# Altium PCB USB Dongle PCB.PcbDoc
Units mm, origin at the board's own origin, x right, y up, seen from the top; angles counter-clockwise.
Board outline 35 x 16 mm, 4 copper layers (Component Side, Ground Plane, Power Plane, Solder Side), stack 1.1 mm thick; 41 components, 33 nets, 166 pads, 35 vias.
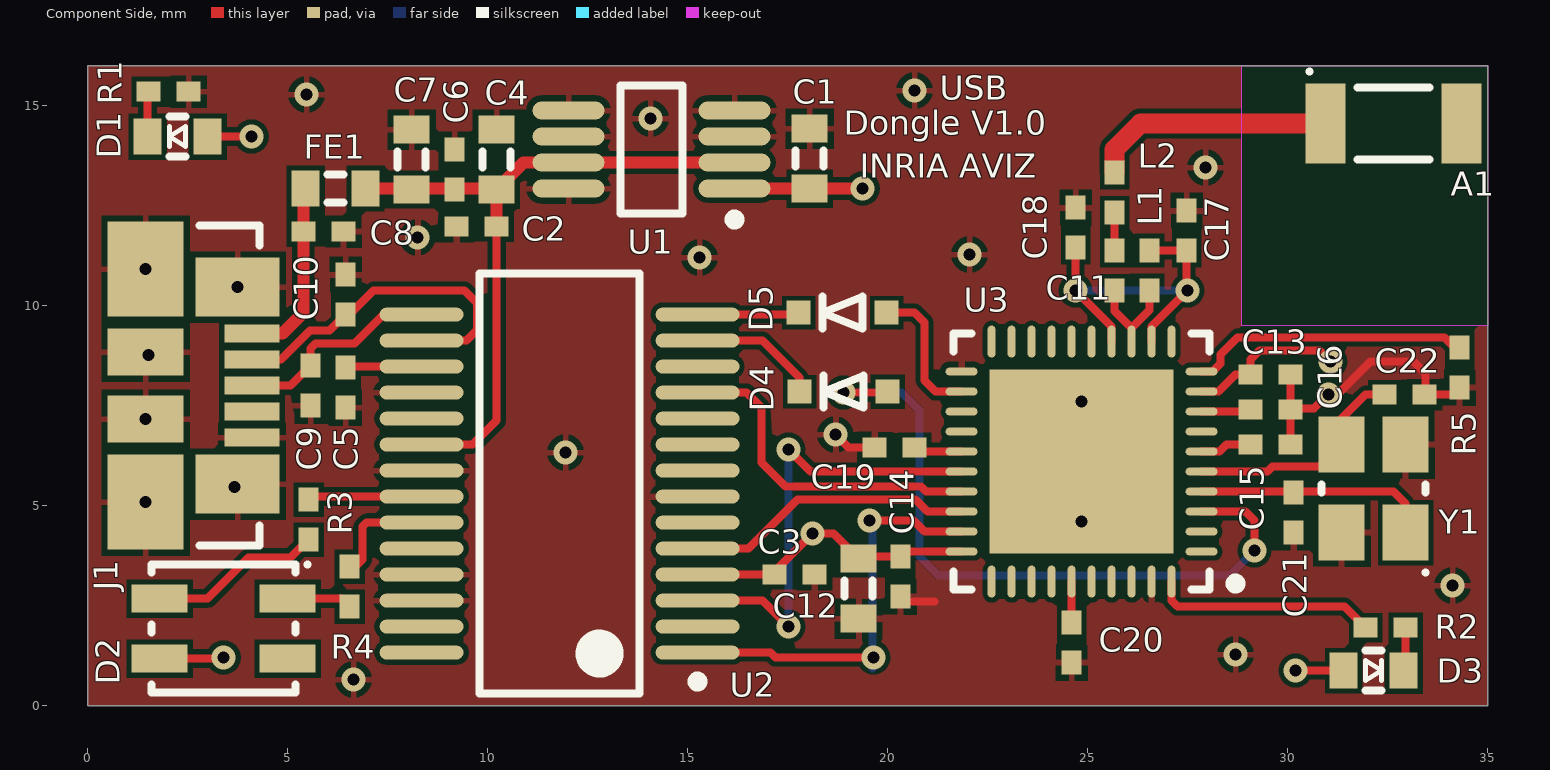
[diagram p0: Component Side view]
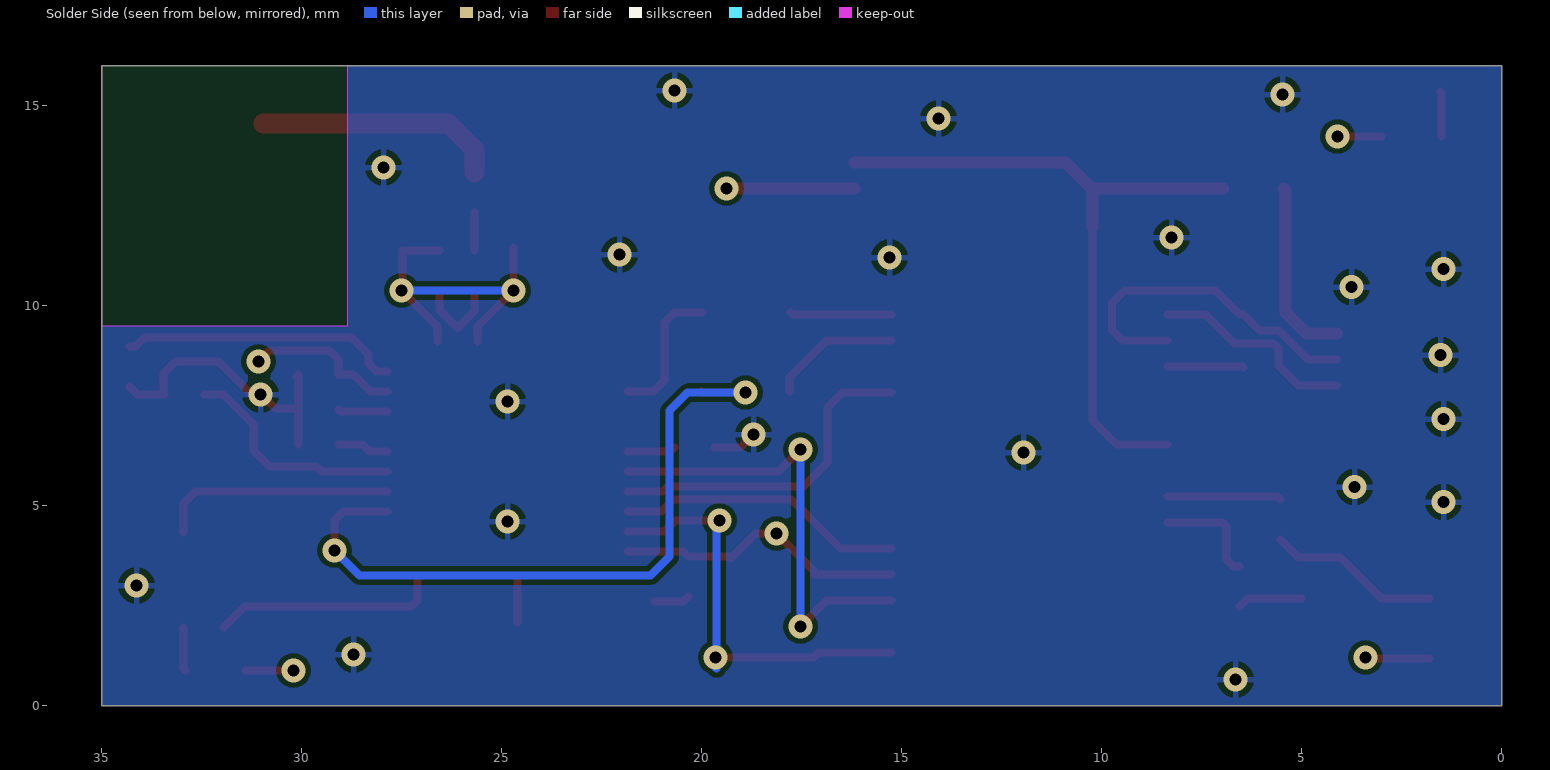
[diagram p1: Solder Side view, seen from below]
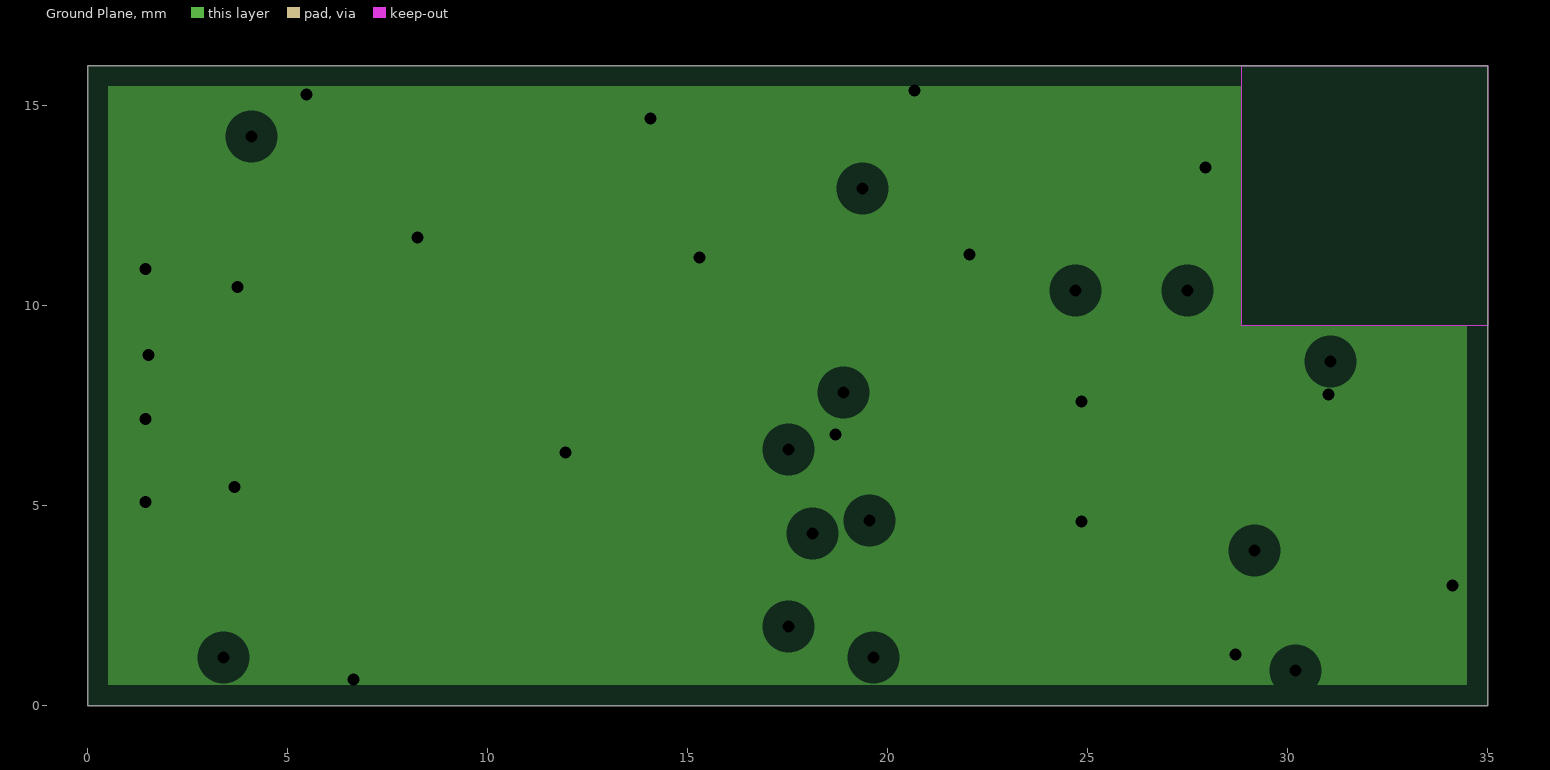
[diagram p2: Ground Plane, clearances drawn from the general rule]
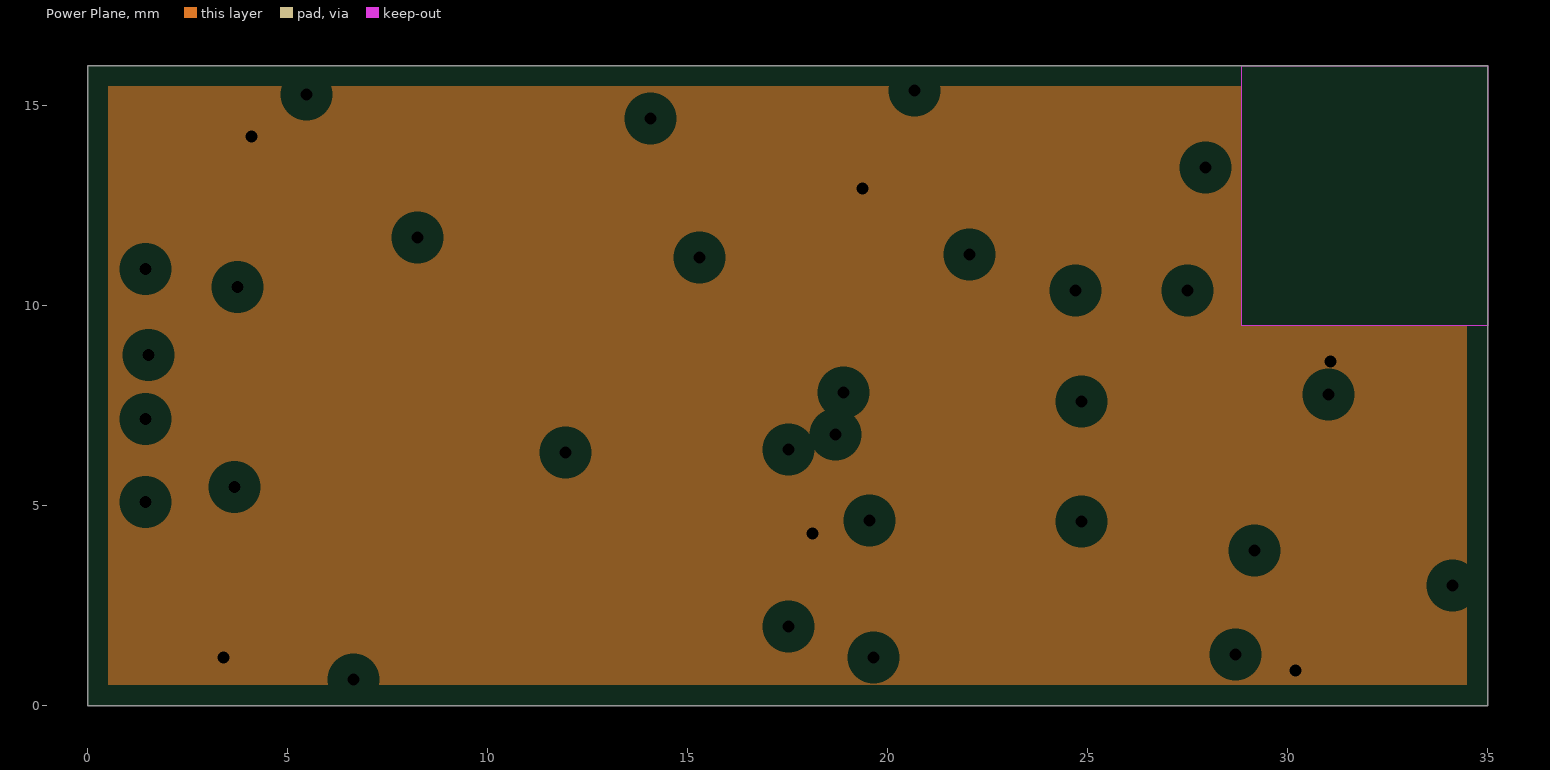
[diagram p3: Power Plane, clearances drawn from the general rule]

## Layer stack, top to bottom
Component Side: signal copper 0.035
Dielectric 1: core 0.3, FR-4, Dk 4.8
Ground Plane: plane copper 0.035, net GND
Dielectric 3: prepreg 0.36, Dk 4.2
Power Plane: plane copper 0.035, net +3.3V
Dielectric 4: core 0.3, Dk 4.2
Solder Side: signal copper 0.035

## Board outline
0,0 0,16 35,16 35,0 0,0

## Design rules (kind name [scope] priority, off if disabled: settings)
Clearance [All] p1: gap=0.125
DiffPairsRouting [All] p1: maxlimit=10 minlimit=0.125 mostfreqgap=0.15 toplayer_minwidth=0.381 toplayer_maxwidth=0.381 toplayer_prefwidth=0.381 bottomlayer_minwidth=0.381 bottomlayer_maxwidth=0.381 bottomlayer_prefwidth=0.381 maxuncoupledlength=12.7
FabricationTestPointUsage FabricationTestPointUsage_1 [All] p1: valid=0 allowmultiple=FALSE
FabricationTestpoint FabricationTestpoint_1 [All] p1: side=3 testpointundercomponent=TRUE minsize=1.016 maxsize=2.54 preferedsize=1.524 minholesize=0 maxholesize=1.016 preferedholesize=0.813 testpointgrid=0.025 allowsidetop=TRUE allowsidebottom=TRUE usegrid=TRUE gridtolerance=0
HoleSize [All] p1: absolutevalues=TRUE maxlimit=6 minlimit=0.2 maxpercent=80.000 minpercent=20.000
HoleSize FabricationTestpoint [All] p2 off: absolutevalues=TRUE maxlimit=2.54 minlimit=0.025 maxpercent=80.000 minpercent=20.000
HoleSize FabricationTestPointUsage [All] p3 off: absolutevalues=TRUE maxlimit=2.54 minlimit=0.025 maxpercent=80.000 minpercent=20.000
MaxMinImpedance "Antenna Impedance" [InNetClass(Antenna)] p1: minimum=50,00 maximum=50,00
MinimumSolderMaskSliver [All] p1: minsoldermaskwidth=0.05
NetAntennae [All] p1 off: netantennaetolerance=0
PlaneClearance [All] p1: clearance=0.5
PlaneConnect [All] p1: planeconnectstyle=Relief reliefexpansion=0.4 reliefentries=4 reliefconductorwidth=0.15 reliefairgap=0.15
PolygonConnect [All] p1: connectstyle=Relief reliefconductorwidth=0.15 reliefentries=4 polygonreliefangle="90 Angle" airgapwidth=0.15
RoutingCorners [All] p1: cornerstyle=45-Degree minsetback=1.25 maxsetback=1.25
RoutingVias [All] p1: holewidth=0.3 width=0.6 viastyle="Through Hole" minholewidth=0.3 minwidth=0.6 maxholewidth=0.3 maxwidth=0.6
SilkToBoardRegionClearance [All] p1 off:
SilkToSilkClearance [All] p1: silktosilkclearance=0.1
SilkToSolderMaskClearance [IsPad] p1: minsilkscreentomaskgap=0.1 clearancetoexposedcopper=TRUE
SolderMaskExpansion [All] p1: expansion=0.075
Width [All] p1: maxlimit=0.5 minlimit=0.125 preferedwidth=0.2 minimp=50.000000 maximp=50.000000 favimp=50.000000
17 further rules are at their usual default settings.

## Components (designator, comment, footprint, x,y, rotation, side; value= is the part's Value field where it differs from the comment)
A1 "2450AT18A100" 2450AT18A100 32.65,14.55 r0 top
C1 "10uF 0603 X5R 6.3V AVX" 0603 18.05,13.675 r270 top
C2 "100nF 0402 X7R 16V ±10%" 0402 9.725,11.975 r0 top
C3 "100nF 0402 X7R 16V ±10%" 0402 17.675,3.275 r180 top
C4 "1uF 0603 X5R 10V MULTICOMP" 0603 10.225,13.65 r270 top
C5 "100nF 0402 X7R 16V ±10%" 0402 6.45,7.95 r270 top
C6 "100nF 0402 X7R 16V ±10%" 0402 9.175,13.4 r270 top
C7 "4.7uF 0603 X5R 10V KEMET" 0603 8.1,13.65 r270 top
C8 "10nF 0402 X7R 25V KEMET" 0402 5.9,11.85 r0 top
C9 "47pF 0402 NP0 50V MURATA" 0402 5.575,8 r90 top
C10 "47pF 0402 NP0 50V MURATA" 0402 6.45,10.275 r270 top
C11 "47pF 0402 NP0 50V ±5%" 0402 25.675,10.875 r270 top
C12 "10uF 0603 X5R 6.3V ±20%" 0603 19.275,2.925 r90 top
C13 "100nF 0402 X7R 16V ±10%" 0402 29.575,8.275 r180 top
C14 "100nF 0402 X7R 16V ±10%" 0402 20.325,3.225 r90 top
C15 "100nF 0402 X7R 16V ±10%" 0402 29.575,6.525 r180 top
C16 "10nF" 0402 29.575,7.4 r180 top
C17 "47pF 0402 NP0 50V ±5%" 0402 27.475,11.875 r270 top
C18 "100nF 0402 X7R 16V ±10%" 0402 24.7,11.95 r270 top
C19 "100nF 0402 X7R 16V ±10%" 0402 20.175,6.45 r0 top
C20 "100nF 0402 X7R 16V ±10%" 0402 24.6,1.575 r90 top
C21 "15pF 0402 NP0 50V ±5%" 0402 30.15,4.825 r90 top
C22 "15pF 0402 NP0 50V ±5%" 0402 32.925,7.775 r180 top
D1 "OVS-0604" "0603 - LED" 2.25,14.225 r180 top
D2 "RGB LED PLCC" PLCC_4 3.4,1.925 r0 top
D3 "OVS-0603" "0603 - LED" 32.15,0.875 r0 top
D4 "Schottky barrier single diode" SOD-323 18.9,7.85 r0 top
D5 "Schottky barrier single diode" SOD-323 18.875,9.825 r0 top
FE1 "MURATA - BLM18PG471SN1D" 0603 6.2,12.925 r0 top
J1 "MICRO USB B" MICRO_USB_B 4.8,8 r0 top
L1 "3.9NH  0402 MURATA" 0402 26.55,10.875 r90 top
L2 "5.1NH  0402 MURATA" 0402 25.675,12.825 r270 top
R1 "180R 0402 1% VISHAY" 0402 2.025,15.35 r180 top
R2 "180R 0402 1/16W ±1%" 0402 32.45,1.95 r0 top
R3 "180R 0402 1/16W ±1%" 0402 5.525,4.65 r270 top
R4 "180R 0402 1/16W ±1%" 0402 6.55,2.975 r270 top
R5 "43K 0402 1/16W ±1%" 0402 34.3,8.45 r270 top
U1 "ADP3333ARMZ-3.3-R7" ADI-RM-8_N 14.1,13.9 r180 top
U2 "FT232RL" SSOP-28_N 11.8,5.55 r180 top
U3 "JN516X" QFN50P600X600X100_HS-41N 24.85,6.1 r180 top
Y1 "TSX-3225" TSX-3225 32.15,5.425 r270 top

## Footprints (in the part's own frame and the unit in brackets; to place one, negate y for a bottom-side part, rotate by r counter-clockwise, add the part's x,y. Pads: shape width x height; smd on the part's side, far side on the other; paste and mask are expansions set on the pad)
0402 [mm] "Chip Body 1.0 x 0.5 mm (LxW typ)"
  rect 0.6x0.5 smd: 1(-0.5,0) 2(0.5,0)
  body extent -0.55,-0.3 0.55,0.3, height 0.55
0603 [mm] "Chip Body 1.6 x 0.8 mm (LxW typ)"
  rect 0.7x0.9 smd: 1(-0.75,0) 2(0.75,0)
  silkscreen extent -0.2,-0.35 0.2,0.35, body extent -0.85,-0.48 0.85,0.48, height 0.9
"0603 - LED" [mm] "Chip Body 1.6 x 0.8 mm (LxW typ)"
  rect 0.7x0.9 smd: 1(-0.75,0) 2(0.75,0)
  silkscreen extent -0.2,-0.5 0.2,0.5, body extent -0.85,-0.48 0.85,0.48, height 0.9
2450AT18A100 [mm]
  rect 1x2 smd: 1(-1.7,0) 2(1.7,0)
  silkscreen extent -2.1,-0.9 0.9,1.3, body extent -1.7,-0.9 1.7,0.9, height 1.9
ADI-RM-8_N [mm] "SOP, 8-Leads, Body 3x3mm, Pitch 0.65mm, IPC Medium Density"
  oval 1.8x0.45 smd: 1(-2.075,0.975) 2(-2.075,0.325) 3(-2.075,-0.325) 4(-2.075,-0.975) 5(2.075,-0.975) 6(2.075,-0.325) 7(2.075,0.325) 8(2.075,0.975)
  silkscreen extent -2.2,-1.6 0.77,1.87, body extent -1.6,-1.6 1.6,1.6, height 1.1
MICRO_USB_B [mm]
  rect 1.38x0.45 smd: 1(-0.69,1.3) 2(-0.69,0.65) 3(-0.69,0) 4(-0.69,-0.65) 5(-0.69,-1.3)
  rect 2.1x1.475 smd: 6(-1.05,-2.462) 7(-1.05,2.462)
  rect 1.9x1.175 smd: 8(-3.35,-0.837) 9(-3.35,0.837)
  rect 1.9x2.375 smd: 10(-3.35,-2.913) 11(-3.35,2.913)
  silkscreen extent -2,-4 -0.5,4, body extent -5.88,-3.99 -0.45,3.99, height 2.69
PLCC_4 [mm] "Chip Body 1.6 x 0.8 mm (LxW typ)"
  rect 1.4x0.7 smd: 1(1.6,0.75) 2(-1.6,0.75) 3(-1.6,-0.75) 4(1.6,-0.75)
  silkscreen extent -1.8,-1.6 2.1,1.6, body extent -1.8,-1.6 1.8,1.6, height 1.9
QFN50P600X600X100_HS-41N [mm]
  oval 0.8x0.2 smd: 1(-3,2.25) 2(-3,1.75) 3(-3,1.25) 4(-3,0.75) 5(-3,0.25) 6(-3,-0.25) 7(-3,-0.75) 8(-3,-1.25) 9(-3,-1.75) 10(-3,-2.25) 21(3,-2.25) 22(3,-1.75) 23(3,-1.25) 24(3,-0.75) 25(3,-0.25) 26(3,0.25) 27(3,0.75) 28(3,1.25) 29(3,1.75) 30(3,2.25)
  oval 0.2x0.8 smd: 11(-2.25,-3) 12(-1.75,-3) 13(-1.25,-3) 14(-0.75,-3) 15(-0.25,-3) 16(0.25,-3) 17(0.75,-3) 18(1.25,-3) 19(1.75,-3) 20(2.25,-3) 31(2.25,3) 32(1.75,3) 33(1.25,3) 34(0.75,3) 35(0.25,3) 36(-0.25,3) 37(-0.75,3) 38(-1.25,3) 39(-1.75,3) 40(-2.25,3)
  rect 4.6x4.6 smd: 41(0,0)
  silkscreen extent -3.98,-3.2 3.2,3.2, body extent -3.05,-3.05 3.05,3.05, height 1
SOD-323 [mm]
  rect 0.6x0.6 smd: 1(-1.1,0) 2(1.1,0)
  silkscreen extent -0.5,-0.4 0.5,0.4, body extent -1.05,-0.82 1.05,0.82, height 0.9
SSOP-28_N [mm] "SOP, 28-Leads, Body 10.2x5.3mm, Pitch 0.65mm, IPC Medium Density"
  oval 2.1x0.35 smd: 1(-3.45,4.225) 2(-3.45,3.575) 3(-3.45,2.925) 4(-3.45,2.275) 5(-3.45,1.625) 6(-3.45,0.975) 7(-3.45,0.325) 8(-3.45,-0.325) 9(-3.45,-0.975) 10(-3.45,-1.625) 11(-3.45,-2.275) 12(-3.45,-2.925) 13(-3.45,-3.575) 14(-3.45,-4.225) 15(3.45,-4.225) 16(3.45,-3.575) 17(3.45,-2.925) 18(3.45,-2.275) 19(3.45,-1.625) 20(3.45,-0.975) 21(3.45,-0.325) 22(3.45,0.325) 23(3.45,0.975) 24(3.45,1.625) 25(3.45,2.275) 26(3.45,2.925) 27(3.45,3.575) 28(3.45,4.225)
  silkscreen extent -3.57,-5.25 2,5.25, body extent -2.8,-5.25 2.8,5.25, height 2
TSX-3225 [mm]
  rect 1.4x1.15 smd: 1(1.1,0.8) 2(-1.1,0.8) 3(-1.1,-0.8) 4(1.1,-0.8)
  silkscreen extent -0.1,-1.3 2.1,1.3, body extent -1.6,-1.25 1.6,1.25, height 1.9

## Part data
A1: "JOHANSON TECHNOLOGY  2450AT18A100E  ANTENNA, CERAMIC, 2.45GHZ"
C1: library part "10uF 0603 X5R 6.3V", "AVX - 06036D106MAT2A - 0603 X5R 6.3V 10UF"
C2 C3 C5 C6 C13 C14 C15 C18 C19 C20: library part "100nF (cheap)"
C4: library part "1uF 0603 X5R 10V", "MULTICOMP - MC0603X105K100CT - MLCC 0603 X5R 10V 1UF"
C7: library part "4.7uF 0603 X5R 10V", "KEMET - C0603C475K8PACTU - CONDENSATEUR 4.7UF 10V X5R 0603"
C8: library part "10nF 0402 X7R 25V", "KEMET - C0402C103J3RACTU - MLCC 0402 25V 0.01UF"
C9 C10: library part "47pF 0402 NP0 50V", "MURATA - GRM1555C1H470JZ01D - 0402 47PF 50V"
C11 C17: library part 47pF
C12: library part "10uF (cheap)"
C16: "10nF 0402 X7R 25V ±5%"
C21 C22: library part 15pF
D1: library part "LED GREEN", "MULTICOMP - OVS-0604 - LED, 0603, GREEN, 300MCD, 520NM"
D2: library part RGB_LED, "MULTICOMP - 703-1028 - LED RGB 3528 PLCC"
D3: library part "LED BLUE", "MULTICOMP - OVS-0603 - LED 0603 SUPER BRIGHT BLUE"
D4 D5: library part 1PS76SB10, "NXP - 1PS76SB10"
FE1: library part FERRITE, "Ferrite Bead (470R ~ 100MHz)"
J1: library part MICRO_USB_B, "MOLEX - 47346-0001 - FEMALE MICRO USB B BOTTOM MOUNT"
L1: library part "3.9NH 0402 ±0.1NH", "MURATA - LQP15MN3N9B02D - 3.9NH ±0.1NH 0402"
L2: library part "5.1NH 0402 ±0.1NH", "MURATA - LQP15MN5N1B02D - 5.1NH ±0.1NH 0402"
R1: library part "180R 0402 1%", "VISHAY DRALORIC - CRCW0402180RFKED - 0402 180R 1%"
R2 R3 R4: library part 180R
R5: library part 43K
U1: "High Accuracy Ultralow IQ, 300 mA, anyCAP Low Dropout Regulator, 2.6 to 12 V Vin, 3.3 V Vout, Industrial, 8-pin SOP (RM-8), Reel"
U2: "USB UART Asynchronous Serial Data Transfer Chip, SSOP-28, Tape and Reel"
U3: "IEEE802.15.4 Wireless Microcontroller"
Y1: "EPSON - TSX-3225, 32MHZ, 10PPM, 9PF - CRYSTAL, TSX-3225, 32MHZ, 10PPM, 9PF"

## Via types
v1: diameter 0.6, hole 0.3, Component Side to Solder Side, 35 vias

## Nets (pads, with @x,y where several pads share a name; then routed paths per layer and width w, separated by ;. In a path a pad name is that pad's centre, name@x,y a point inside that pad or via, vN(x,y) a via of type N, cw(c..) or ccw(c..) an arc to the next point about the centre after c; other vN are vias at no path point)
+3.3V: C1.2 C3.2 C12.2 C13.2 C14.2 D1.1 D2.3 D3.1 U1.1 U2.4 U3.9 U3.30 | length 18.5
  Component Side w0.2: D2.3 3.4,1.175 v1(3.4,1.2) ; D1.1 v1(4.1,14.225) ; U2.4 16.45,3.275 C3.2 17.175,3.35 v1(18.125,4.3) 18.65,4.3 C12.2 19.325,3.725 C14.2 20.45,3.85 U3.30 ; U3.9 28.275,7.85 28.7,8.275 C13.2 29.075,8.65 29.3,8.875 30.8,8.875 v1(31.075,8.6) ; v1(30.2,0.875) D3.1
  Component Side w0.3: U1.1 C1.2 v1(19.375,12.925)
GND: C1.1 C2.1 C3.1 C4.1 C5.2 C6.1 C7.1 C8.2 C9.1 C10.1 C12.1 C13.1 C14.1 C15.1 C16.1 C17.1 C18.1 C19.1 C20.1 C21.1 C22.1 J1.5 J1.6 J1.7 J1.8 J1.9 J1.10 J1.11 R1.1 R5.2 U1.3 U1.4 U1.5 U1.6 U1.8 U2.7 U2.18 U2.21 U2.25 U2.26 U3.21 U3.39 U3.41 Y1.2 Y1.4 | length 9.3
  Component Side w0.2: v1(18.7,6.775) 19.025,6.45 C19.1 ; C14.1 20.45,2.6 21.175,2.6 ; C15.1 C16.1 ; C13.1@30.125,8.225 C13.1 C16.1 ; R5.2@34.3,7.975 34.1,7.775 C22.1 33.45,7.8 33.45,8.3 33.15,8.6 32.075,8.6 31.25,7.775 v1(31.025,7.775) 31.007,7.775 30.657,7.425 30.1,7.425 C16.1
  other v1: 6.65,0.65 28.7,1.275 34.125,3 24.85,4.6 1.45,5.087 3.675,5.463 11.95,6.325 1.45,7.163 24.85,7.6 1.525,8.762 3.75,10.462 1.45,10.913 15.3,11.2 22.05,11.275 8.25,11.7 27.95,13.45 14.075,14.675 5.475,15.275 20.675,15.375
IBIAS: R5.1 U3.10 | length 7
  Component Side w0.2: U3.10 28.125,8.35 28.325,8.55 28.325,8.775 28.75,9.2 33.925,9.2 34.15,8.975 R5.1@34.3,8.975
LED0: R4.1 U2.23 | length 2.7
  Component Side w0.2: R4.1 6.7,3.475 6.875,3.65 6.875,4.475 6.975,4.575 U2.23
LED1: R3.1 U2.22 | length 2.9
  Component Side w0.2: R3.1 5.6,5.225 U2.22
LED2: R2.1 U3.40 | length 5.6
  Component Side w0.2: U3.40 27.1,2.625 27.25,2.475 31.425,2.475 R2.1
NetA1_1: A1.1 L2.1 | length 6.1
  Component Side w0.5: L2.1 25.675,13.9 26.325,14.55 A1.1
NetC5_1: C5.1 U2.17 | length 1.9
  Component Side w0.2: C5.1 6.475,8.475 U2.17
NetC8_1: C8.1 FE1.1 J1.1 | length 4.6
  Component Side w0.3: J1.1 4.875,9.3 5.4,9.825 C8.1 5.4,12.875 FE1.1
NetC11_1: C11.1 L2.2 | length 1
  Component Side w0.2: C11.1 L2.2
NetC11_2: C11.2 L1.1 U3.13 | length 2.2
  Component Side w0.2: C11.2 25.675,9.86 26.1,9.435 26.55,9.885 L1.1
NetD1_2: D1.2 R1.2 | length 1.1
  Component Side w0.2: D1.2 1.5,15.325 R1.2
NetD2_1: D2.1 R4.2 | length 1.6
  Component Side w0.2: D2.1 6.35,2.675 R4.2
NetD2_2: D2.2 R3.2 | length 4.3
  Component Side w0.2: D2.2 3,2.675 4.025,3.7 5.075,3.7 R3.2
NetD3_2: D3.2 R2.2 | length 1.1
  Component Side w0.2: D3.2 32.95,0.925 R2.2
NetD4_1: D4.1 U2.13 | length 3.3
  Component Side w0.2: U2.13 16.875,9.125 17.8,8.2 D4.1
NetD5_1: D5.1 U2.14 | length 2.5
  Component Side w0.2: U2.14 17.725,9.775 D5.1
PROG_CTS: U2.11 U3.27 | length 8.4
  Component Side w0.2: U2.11 16.475,7.825 16.85,7.45 16.85,6.075 17.45,5.475 20.835,5.475 20.96,5.35 U3.27
PROG_MISO: D5.2 U3.22 | length 3.5
  Component Side w0.2: D5.2 20.675,9.825 20.925,9.575 20.925,8.125 21.2,7.85 U3.22
PROG_RTS: U2.3 U3.26 | length 11.5
  Component Side w0.2: U2.3 16.875,2.625 v1(17.525,1.975) ; v1(17.525,6.4) 18.075,5.85 20.919,5.85 21.1,5.85 U3.26
  Solder Side w0.2: v1(17.525,1.975) v1(17.525,6.4)
PROG_RXD: U2.5 U3.28 | length 7.2
  Component Side w0.2: U2.5 16.525,3.925 17.75,5.15 20.7,5.15 21,4.85 U3.28
PROG_TXD: U2.1 U3.29 | length 10.9
  Component Side w0.2: U2.1 17.075,1.325 17.2,1.2 v1(19.65,1.2) ; v1(19.55,4.625) 20.65,4.625 20.925,4.35 U3.29
  Solder Side w0.2: v1(19.55,4.625) 19.625,4.55 19.625,0.925 19.65,0.95 v1(19.65,1.2)
R\S\T\: D4.2 U3.3 | length 17.8
  Component Side w0.2: v1(18.9,7.825) 19.975,7.825 D4.2 ; U3.3 28.95,4.85 29.175,4.625 v1(29.175,3.875)
  Solder Side w0.2: v1(18.9,7.825) 20.35,7.825 20.8,7.375 20.8,3.725 21.275,3.25 28.55,3.25 v1(29.175,3.875)
USB_D+: C9.2 J1.3 U2.15 | length 5.2
  Component Side w0.2: J1.3 5.075,8 C9.2 5.575,8.925 5.7,9.05 6.675,9.05 7.4,9.775 U2.15
USB_D-: C10.2 J1.2 U2.16 | length 8.6
  Component Side w0.2: J1.2 4.84,8.65 5.565,9.375 6.05,9.375 C10.2 6.55,9.775 7.15,10.375 9.425,10.375 9.737,10.063 9.737,9.387 9.475,9.125 U2.16
VB_DIG: C20.2 U3.35 | length 1
  Component Side w0.2: C20.2 U3.35
VB_RAM: C19.2 U3.25 | length 1.2
  Component Side w0.2: C19.2 20.775,6.35 U3.25
VB_RF: C17.2 C18.2 L1.2 U3.12 U3.14 | length 9.1
  Component Side w0.2: C18.2 v1(24.7,10.375) 25.6,9.475 U3.14 ; L1.2 C17.2 27.475,10.4 v1(27.5,10.375) 26.6,9.475 U3.12
  Solder Side w0.2: v1(24.7,10.375) v1(27.5,10.375)
VB_SYNTH: C15.2 U3.6 | length 1.3
  Component Side w0.2: U3.6 28.3,6.35 28.475,6.525 C15.2
VB_VCO: C16.2 U3.8 | length 1.2
  Component Side w0.2: U3.8 29.025,7.35 C16.2
VCCUSB: C2.2 C4.2 C6.2 C7.2 FE1.2 U1.2 U1.7 U2.20 | length 17.4
  Component Side w0.2: U2.20 9.625,6.525 10.225,7.125 C2.2
  Component Side w0.3: FE1.2 10.2,12.925 C4.2 ; C2.2 C4.2 ; U1.2 U1.7 10.9,13.575 C4.2
X1_32MHZ: C21.2 U3.4 Y1.1 | length 5.9
  Component Side w0.2: U3.4 32.65,5.35 32.95,5.05 Y1.1
X2_32MHZ: C22.2 U3.5 Y1.3 | length 5.8
  Component Side w0.2: U3.5 29.5,5.85 29.625,5.975 30.8,5.975 31.2,6.375 31.2,7.025 31.95,7.775 C22.2
pads on no net: A1.2 D2.4 J1.4 U2.2 U2.6 U2.8 U2.9 U2.10 U2.12 U2.19 U2.24 U2.27 U2.28 U3.1 U3.2 U3.7 U3.11 U3.15 U3.16 U3.17 U3.18 U3.19 U3.20 U3.23 U3.24 U3.31 U3.32 U3.33 U3.34 U3.36 U3.37 U3.38

## Polygon pours and split planes (outlines as drawn)
GND on Solder Side "Bottom Ground Plane" (solid, remove dead copper, pour order 4): 0,0 35,0 35,16 0,16 0,0
GND on Component Side "Top Ground Plane" (solid, remove dead copper, pour order 2): 0,0 0,16 35,16 35,0 0,0
GND on Ground Plane (split plane): 28.85,9.5 34.49,9.5 34.49,0.51 0.51,0.51 0.51,15.49 28.85,15.49
+3.3V on Power Plane (split plane): 28.85,9.5 34.49,9.5 34.49,0.51 0.51,0.51 0.51,15.49 28.85,15.49

## Keep-outs
Keep-Out Layer:
  pour cut-out: 35,16 35,9.5 28.85,9.5 28.85,16

## Other copper
Ground Plane (plane layer: these items are gaps in the copper):
  pour cut-out: 35,16 35,9.5 28.85,9.5 28.85,16
  lines w0.2: 28.85,16 28.9,16
Power Plane (plane layer: these items are gaps in the copper):
  pour cut-out: 35,16 35,9.5 28.85,9.5 28.85,16 35,16

## Silkscreen, mask and mechanical layers (free items; w line width, h text height)
Top Overlay:
  text "USB" at 21.3,15.15 h0.6
  text "Dongle V1.0" at 18.9,14.275 h0.6
  text "INRIA AVIZ" at 19.3,13.2 h0.6